# EAGLE board SONAR_UPDATED_PCB (EAGLE 9.6.2)
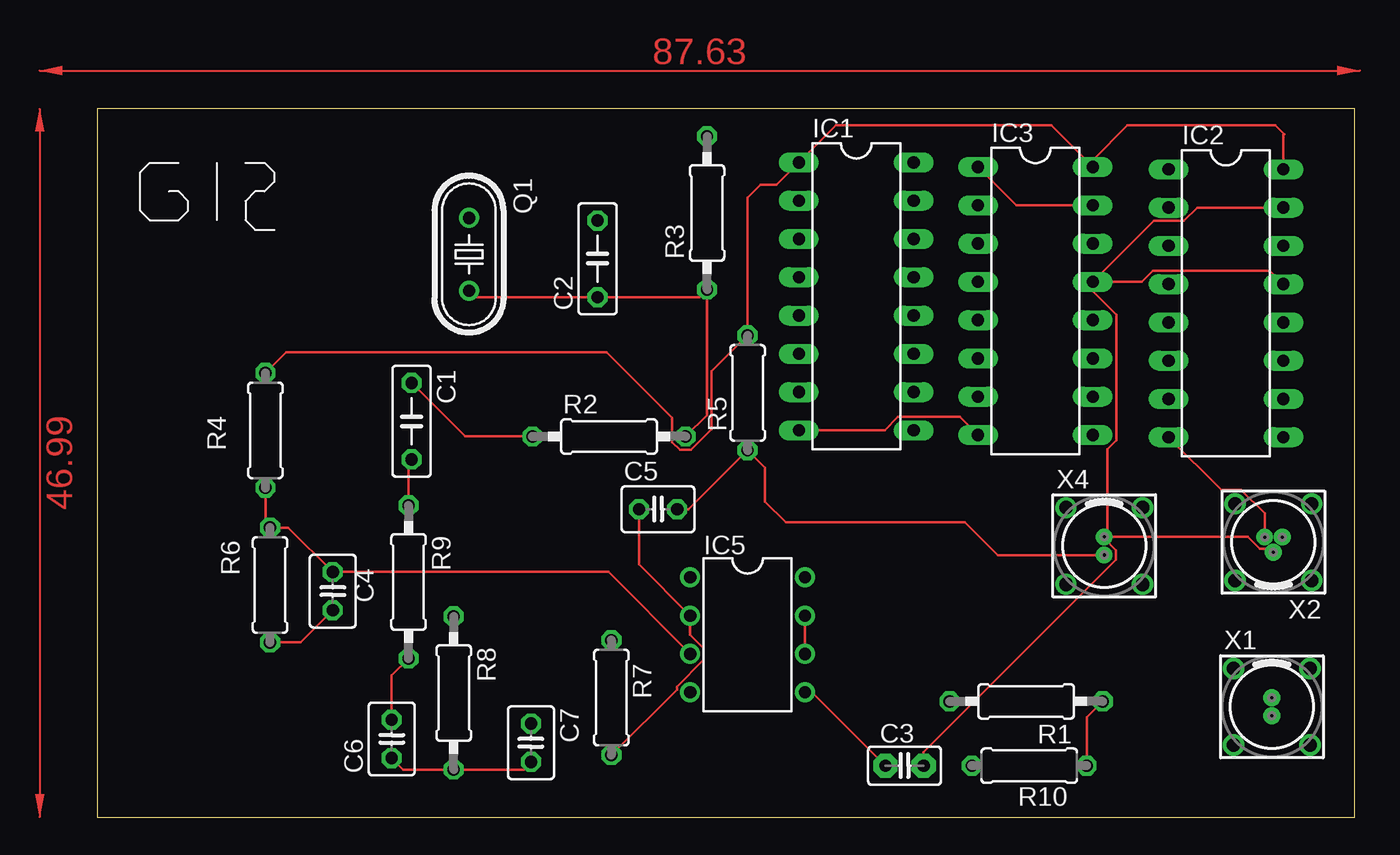
[diagram p0: board, top side]
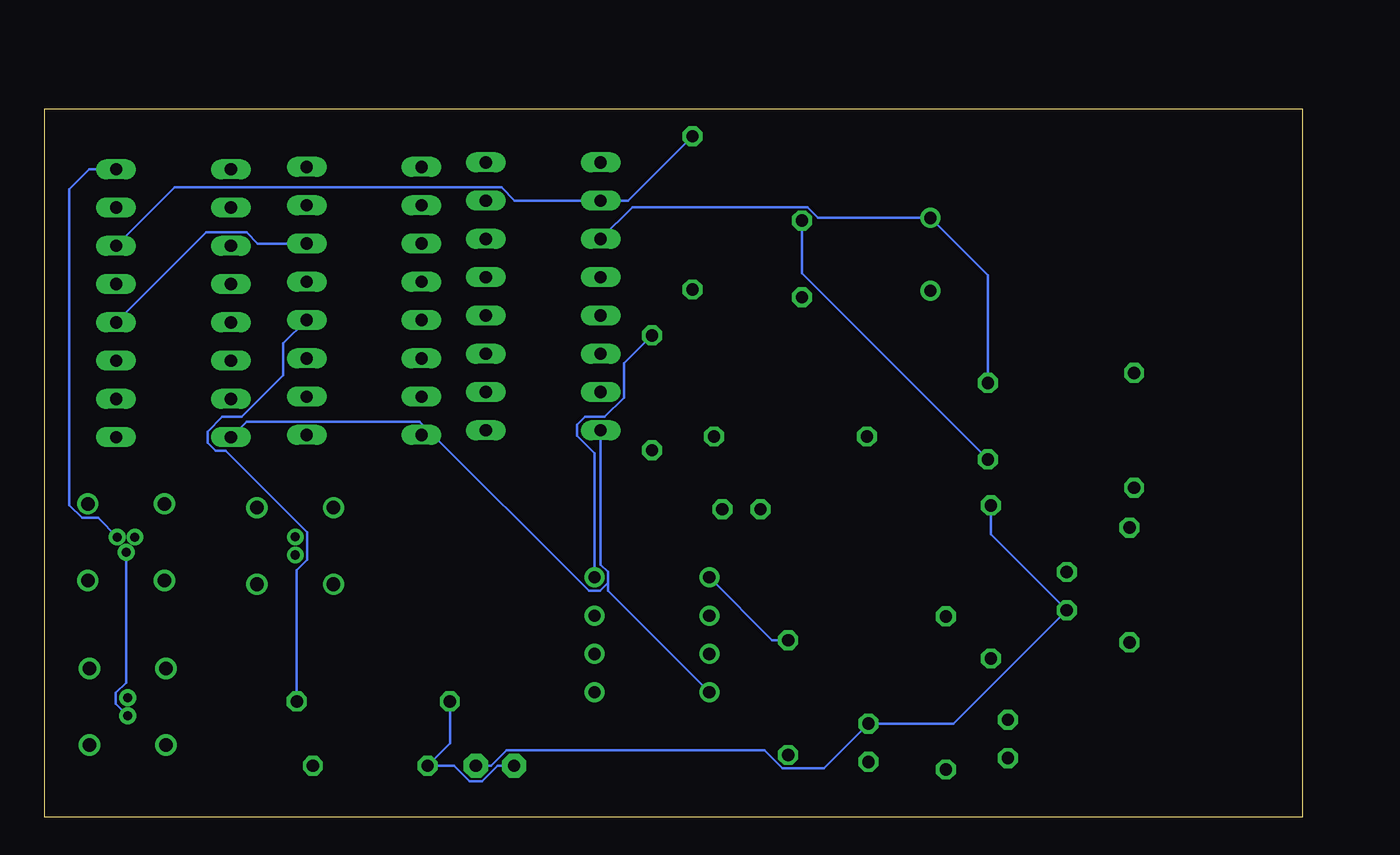
[diagram p1: board, bottom side, seen from below]

Size 83.49 x 46.98 mm. Coordinates in mm from the lower left corner, seen from the top.
Outline: 0,0 83.49,0 83.49,46.98 0,46.98 0,0
Copper layers (1*16): Top 0.035mm / dielectric 1.5mm / Bottom 0.035mm
Design rules "default": minimum track width 6mil, minimum drill 0.35mm, track to track 6mil, track to pad 6mil, pad to pad 6mil, via to via 6mil, smd to smd 6mil, copper to edge 40mil, drill to drill 6mil, minimum pad ring 10mil, minimum via ring 8mil, stop-mask expansion 4mil, vias tented up to drill 0mil, thermal gap 10mil

## Footprints (pad centres in the part's own frame; a part is rotated, then mirrored left to right if it is on the bottom)
C050-025X075 = drill 0.813 octagon: 1 -2.54,0; 2 2.54,0
C2.5-2 = drill 0.813 pad 1.6 octagon: 1 -1.27,0; 2 1.27,0
C025-030X050 = drill 0.813 octagon: 1 -1.27,0; 2 1.27,0
DIL16 = drill 0.813 long: 1 -8.89,-3.81; 2 -6.35,-3.81; 3 -3.81,-3.81; 4 -1.27,-3.81; 5 1.27,-3.81; 6 3.81,-3.81; 7 6.35,-3.81; 8 8.89,-3.81; 9 8.89,3.81; 10 6.35,3.81; 11 3.81,3.81; 12 1.27,3.81; 13 -1.27,3.81; 14 -3.81,3.81; 15 -6.35,3.81; 16 -8.89,3.81
DIL08 = drill 0.813 pad 1.27: 1 -3.81,-3.81; 2 -1.27,-3.81; 3 1.27,-3.81; 4 3.81,-3.81; 5 3.81,3.81; 6 1.27,3.81; 7 -1.27,3.81; 8 -3.81,3.81
HC49U-V = drill 0.813: 1 -2.413,0; 2 2.413,0
0207/10 = drill 0.813 octagon: 1 -5.08,0; 2 5.08,0
0207/7 = drill 0.813 octagon: 1 -3.81,0; 2 3.81,0
EZG-00-302 = drill 0.6 pad 1: 1 0,0.6; 2 0,-0.6 | drill 0.9 pad 1.2: M1 -2.54,2.54; M2 2.54,2.54; M3 2.54,-2.54; M4 -2.54,-2.54
EZG-00-303 = drill 0.6 pad 1: 1 0,0.675; 2 -0.585,-0.338; 3 0.585,-0.338 | drill 0.9 pad 1.2: M1 -2.54,2.54; M2 2.54,2.54; M3 2.54,-2.54; M4 -2.54,-2.54

## Placement (x,y rotation side)
C1  [C050-025X075]  20.88,26.26 270 top
C2  [C050-025X075]  33.22,37.03 90 top
C3  [C2.5-2]  53.59,3.4 0 top
C4  [C025-030X050]  15.65,14.99 270 top
C5  [C025-030X050]  37.24,20.42 0 top
C6  [C025-030X050]  19.56,5.18 90 top
C7  [C025-030X050]  28.8,4.93 270 top
E$1  [G12]  33.99,33.88 0 top
IC1  4049N  [DIL16]  50.39,34.54 270 top
IC2  4017N  [DIL16]  74.93,34.09 270 top
IC3  4017N  [DIL16]  62.28,34.24 270 top
IC5  TL072P  [DIL08]  43.18,12.09 270 top
Q1  [HC49U-V]  24.69,37.34 270 top
R1  [0207/10]  61.67,7.67 180 top
R2  [0207/10]  33.99,25.25 0 top
R3  [0207/10]  40.49,40.08 90 top
R4  [0207/7]  11.18,25.65 90 top
R5  [0207/7]  43.18,28.14 90 top
R6  [0207/7]  11.48,15.39 90 top
R7  [0207/7]  34.14,7.92 270 top
R8  [0207/10]  23.67,8.23 270 top
R9  [0207/10]  20.68,15.6 270 top
R10  [0207/7]  61.87,3.4 180 top
X1  EZG-00-302  [EZG-00-302]  77.98,7.32 0 top
X2  EZG-00-303  [EZG-00-303]  78.08,18.24 180 top
X4  EZG-00-302  [EZG-00-302]  66.85,17.98 0 top

## Library data of the parts
C1 C2 C4-C7 = rcl; SPICEPREFIX: C
C3 = capacitor-wima
E$1 = G12_FP
IC1-IC3 = 40xx
IC5 = linear
Q1 = crystal; OC_FARNELL: 1666969; OC_NEWARK: unknown
R1-R10 = rcl; SPICEPREFIX: R
X1 X2 X4 = con-lemo; OC_FARNELL: unknown; OC_NEWARK: unknown

## Nets
GND: C1.2 C2.2 C3.2 C4.2 C7.1 IC2.13 IC2.15 IC3.13 R6.1 R9.1 X1.2 X2.1 X4.1
N$1: C1.1 IC1.3 Q1.1 R2.1
N$2: IC1.2 IC2.14 R3.2
N$3: IC2.12 IC3.14
N$4: IC3.12 R1.1 R10.1
N$5: IC3.1 IC3.15
N$6: C3.1 IC5.5 R1.2 R10.2
N$7: X1.1
N$9: C2.1 Q1.2 R2.2 R3.1
N$10: C4.1 IC5.3 R4.1 R6.2
N$11: C5.1 IC5.2 R7.2
N$12: C5.2 R5.1 X4.2
N$13: IC5.1 R7.1
N$16: C6.2 R9.2
N$17: C6.1 C7.2 R8.2
S$1: IC5.6 IC5.7
VDD: IC1.1 IC2.16 IC3.16 IC5.8 R4.2 R5.2 X2.2
VSS: IC1.8 IC2.8 IC3.8 IC5.4 X2.3

## Tracks (layer width: path | path; a pad name or v marks a point on that pad's centre or on a via)
GND
  Top 0.152: 67.06,18.58 X4.1 66.85,18.49 67.64,17.71 67.64,17.06 54.86,4.29 C3.2 | 67.06,18.58 76.38,18.58 77.17,17.79 77.85,17.79 X2.1 | C4.2 13.51,11.58 R6.1 | IC3.13 69.36,35.51 70.09,36.25 77.85,36.25 IC2.13 | IC3.13 70.13,39.55 72.15,39.55 73.04,40.44 IC2.15 | IC3.13 66.09,34.89 67.64,33.34 67.64,24.98 67.06,24.4 67.06,18.58 | R9.1 20.68,23.52 C1.2
  Bottom 0.152: C3.2 53.84,3.4 52.81,4.43 35.71,4.43 34.51,3.23 31.77,3.23 C7.1 23.16,6.2 C4.2 20.68,18.74 R9.1 | C1.2 33.22,36.07 C2.2 | X2.1 78.08,8.92 78.76,8.24 78.76,7.5 X1.2
N$1
  Top 0.152: R2.1 24.43,25.25 C1.1
  Bottom 0.152: C1.1 20.88,35.94 Q1.1 32.14,39.75 32.85,40.46 44.48,40.46 IC1.3
N$2
  Bottom 0.152: R3.2 44.76,40.89 IC1.2 52.29,40.89 53.17,41.78 74.85,41.78 IC2.14
N$3
  Bottom 0.152: IC3.14 69.36,38.05 70.09,38.79 72.77,38.79 IC2.12
N$4
  Top 0.152: R10.1 65.68,6.6 R1.1
  Bottom 0.152: R1.1 66.75,16.38 66.07,17.06 66.07,18.91 71.47,24.31 72.15,24.31 72.67,24.83 72.67,25.56 71.69,26.54 70.4,26.54 67.64,29.3 67.64,31.42 IC3.12
N$5
  Top 0.152: IC3.15 61.01,40.59 IC3.1
N$6
  Top 0.152: IC5.5 47.45,8.28 C3.1
  Bottom 0.152: R1.2 56.59,4.88 R10.2 56.32,3.4 55.29,2.38 54.44,2.38 53.41,3.4 C3.1
N$9
  Top 0.152: Q1.2 25.12,34.49 C2.1 39.98,34.49 R3.1 40.49,26.67 R2.2
N$10
  Top 0.152: R4.1 11.18,19.51 R6.2 12.7,19.2 C4.1 33.93,16.26 IC5.3
N$11
  Top 0.152: C5.1 35.97,16.76 IC5.2 39.37,12.08 40.26,11.19 40.26,10.43 38.48,8.65 38.48,8.46 R7.2
N$12
  Top 0.152: C5.2 39.27,20.42 R5.1 44.35,23.16 44.35,20.93 45.72,19.56 57.61,19.56 59.78,17.38 X4.2
N$13
  Bottom 0.152: IC5.1 35.2,11.73 R7.1
N$16
  Top 0.152: C6.2 19.56,9.4 R9.2
N$17
  Top 0.152: C7.2 28.3,3.15 R8.2 20.32,3.15 C6.1
S$1
  Top 0.152: IC5.7 IC5.6
VDD
  Top 0.152: IC2.16 78.74,45.26 78.79,45.31 78.22,45.89 68.39,45.89 66.09,43.59 IC3.16 63.33,45.89 49.04,45.89 IC1.1 45.11,41.96 44.04,41.96 43.18,41.1 R5.2 40.79,29.57 40.79,25.72 39.43,24.36 38.7,24.36 38.18,24.88 38.18,26.49 33.83,30.84 12.55,30.84 R4.2
  Bottom 0.152: R5.2 45.03,30.1 45.03,27.83 46.32,26.54 47.61,26.54 48.13,26.02 48.13,25.29 46.99,24.14 IC5.8 | X2.2 79.93,19.84 81.01,19.84 81.84,20.68 81.84,41.66 80.52,42.98 IC2.16
VSS
  Top 0.152: IC1.8 52.29,25.65 53.17,26.54 57.28,26.54 IC3.8 | IC2.8 74.61,21.71 75.93,21.71 77.5,20.14 X2.3
  Bottom 0.152: IC5.4 46.1,15.01 46.1,15.53 | 46.1,15.53 46.1,16.27 46.58,16.75 IC1.8 | 46.1,15.53 46.62,15.01 47.36,15.01 58.59,26.24 70.08,26.24 IC2.8
(copper drawn outside any net)
  shapes: Top area x2